# Altium PCB h743PCB.PcbDoc (part 3 of 3)
Units mil, origin at the board's own origin, x right, y up, seen from the top; angles counter-clockwise.
Board outline 2560 x 1770 mil, 4 copper layers (Top Layer, Signal, some, Bottom Layer), stack 63.712 mil thick; 101 components, 163 nets, 684 pads, 394 vias.
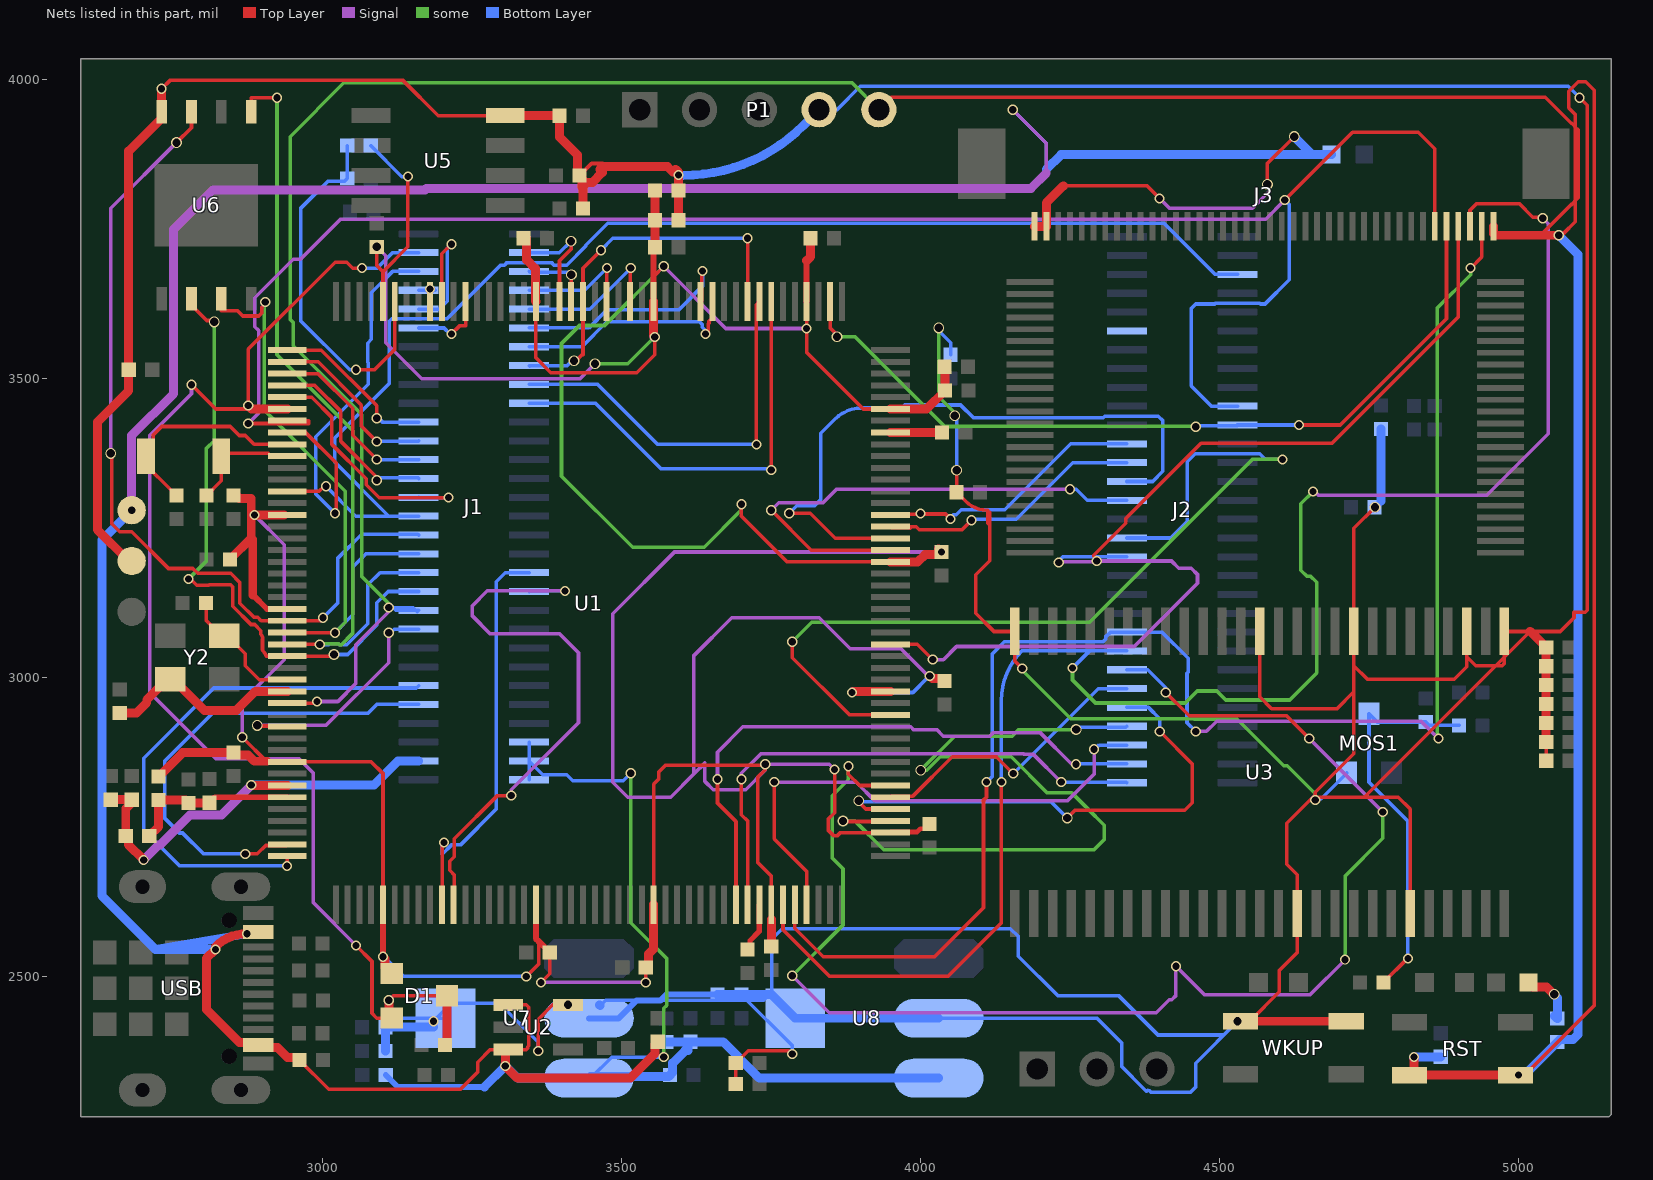
[diagram p5: the nets of this part, all layers, seen from the top]

## Via types
v1: diameter 17, hole 12, Top Layer to Bottom Layer, 305 vias
v2: diameter 18, hole 14, Top Layer to Bottom Layer, 72 vias
v3: diameter 17/16/16/16 (per signal layer), hole 12, Top Layer to Bottom Layer, 17 vias

## Nets (pads, with @x,y where several pads share a name; then routed paths per layer and width w, separated by ;. In a path a pad name is that pad's centre, name@x,y a point inside that pad or via, vN(x,y) a via of type N, cw(c..) or ccw(c..) an arc to the next point about the centre after c; other vN are vias at no path point) (continued)
PB7: J1.25 U1.165 | length 129.9
  Top Layer w6: v3(3215,3575) 3228.3,3588.3 3239.08,3588.3 3239.08,3628.17 U1.165@3238.15,3629.09
  Bottom Layer w6: J1.25@3160,3584.92 3160.09,3584.83 3202.46,3584.83 3212.29,3575 v3(3215,3575)
PB8: J1.26 U1.167 | length 255.4
  Top Layer w6: U1.167@3198.78,3629.09 3199.88,3630.19 3199.88,3657.25 3198.78,3658.35 3198.78,3708.78 v1(3215,3725)
  Bottom Layer w6: J1.26@3160,3616.42 3195,3616.42 3208.03,3629.45 3208.03,3718.03 v1(3215,3725)
PB9: J1.27 U1.168 | length 57.8
  Top Layer w6: U1.168@3179.1,3629.09 3179.1,3650 v1(3179.28,3650)
  Bottom Layer w6: J1.27@3160,3647.91 3180,3647.91 3187.56,3647.91 3185.47,3650 v1(3179.28,3650)
PB10: J2.2 U1.79 | length 1011
  Top Layer w6: v1(3660,2830) 3660,2790 3690.91,2759.09 U1.79@3690.91,2620
  Signal w6: v1(3660,2830) 3660,2875 3702.5,2917.5 3983.1,2917.5 3987.6,2913 4026.75,2913 4037.75,2902 4115.69,2902 4121.69,2908 4199.63,2908 4252.63,2855 v1(4260,2855)
  Bottom Layer w6: v1(4260,2855) 4260,2851.75 4258.25,2850 4263.8,2855.55 J2.2@4345,2855.55
PB11: J2.1 U1.80 | length 902.8
  Top Layer w6: v1(3700,2830) 3700,2770.59 3710.59,2760 U1.80@3710.59,2620
  Signal w6: v1(3700,2830) 3700,2839.75 3732.75,2872.5 4172.04,2872.5 4172.54,2872 4188,2872 v1(4235,2825)
  Bottom Layer w6: v1(4235,2825) 4344.06,2825 J2.1@4345,2824.06
PB12: J2.4 U1.92 | length 1306.3
  Top Layer w6: v2(3870,2760) 3870.81,2759.19 3948.2,2759.19 U1.92@3949.39,2760.37
  some w6: v2(3870,2760) 3890,2760 3938,2712 4290,2712 4307,2729 4307,2753 4279,2781 4253,2807 4211.75,2807 4151.25,2867.5 4032.5,2867.5 4010,2845 v2@4005,2845 ; v2(4000,2845) v2@4005,2845 ; v2(4260,2913) 4164,2913 4153,2902 4057,2902 4003.92,2848.92 4003.92,2846.08 v2@4005,2845
  Bottom Layer w6: v2(4260,2913) 4260,2913.26 4263.51,2916.77 4343.23,2916.77 J2.4@4345,2918.54
PB13: J2.5 U1.93 | length 866.8
  Top Layer w6: v2(3896.31,2794) 3896.31,2791.66 3907.91,2780.06 U1.93@3949.39,2780.06 ; v2(4245,2765) 4258,2778 4441.75,2778 4454.5,2790.75 4454.5,2855.5 v1(4400,2910)
  Bottom Layer w6: v2(3896.31,2794) 3898.31,2792 4218,2792 v2(4245,2765) ; J2.5@4345,2950.04 4380.96,2950.04 4400,2931 v1(4400,2910)
PB14: J2.6 U1.94 | length 494.3
  Top Layer w6: U1.94@3949.39,2799.74 3951.39,2801.74 3987,2801.74 4052.75,2867.5 4126.5,2867.5 v1(4154.73,2839.27)
  Bottom Layer w6: v1(4154.73,2839.27) 4297,2981.54 J2.6@4345,2981.54
PB15: J2.7 U1.95 | length 2356.2
  Top Layer w6: v1(3879,2851.53) 3879,2838.25 3897.82,2819.43 U1.95@3949.39,2819.43 ; v1(4410,2975) 4449,2936 4612,2936 v1(4650,2898)
  Signal w6: v1(3785,2501) 3847,2439 4394,2439 4416,2461 4420,2461 4427,2468 v1(4427,2517) 4475,2469 4650.97,2469 v1(4710,2528.03) ; v1(4650,2898) v1(4773,2775)
  some w6: v1(3785,2501) 3870,2586 3870,2680 3852,2698 3852,2802 3879,2829 v1(3879,2851.53) ; v1(4710,2528.03) 4710,2668 4773,2731 v1(4773,2775)
  Bottom Layer w6: J2.7@4345,3013.03 4380,3013.03 4410,2983.03 v1(4410,2975)
PC1: J1.9 U1.33 | length 417.2
  Top Layer w6: v2(2890,2920) 2891.07,2918.93 2939.22,2918.93 U1.33@2940.3,2917.85
  Signal w6: v2(2890,2920) 3005,2920 3110,3025 v1(3110,3075)
  Bottom Layer w6: v1(3110,3075) 3113.07,3075 3119.06,3080.98 J1.9@3160,3080.98
PC4: J1.49 U1.54 | length 689.9
  Top Layer w6: U1.54@3198.78,2620 3199.39,2620.61 3199.39,2704.39 3199.39,2721.17 v1(3202.22,2724)
  Bottom Layer w6: v1(3202.22,2724) 3199.39,2721.17 3199.39,2704.39 3215,2720 3230,2720 3290,2780 3290,3160.47 3305,3175.47 J1.49@3345.04,3175.47
PC5: J1.50 U1.55 | length 973.7
  Top Layer w6: U1.55@3218.47,2620 3219.72,2621.25 3219.72,2669.82 3212,2677.54 3212,2692.46 3219.72,2700.18 3219.72,2730.35 3291.92,2802.54 v1(3315,2802.54)
  Signal w6: v1(3315,2802.54) 3315,2812.09 3427.5,2924.59 3427.5,3041.54 3396.04,3073 3280,3073 3250,3103 3250,3120 3275,3145 v1(3405,3145)
  Bottom Layer w6: J1.50@3345.04,3143.98 3346.06,3145 v1(3405,3145)
PC6: J2.16 U1.115 | length 844.3
  Top Layer w6: v1(3750,3280) 3750.25,3280 3817.12,3213.13 U1.115@3949.39,3213.13
  Signal w6: v1(3750,3280) 3762.5,3292.5 3836.5,3292.5 3859,3315 v1(4250,3315)
  Bottom Layer w6: v1(4250,3315) 4260,3315 4278.5,3296.5 J2.16@4345,3296.5
PC7: J2.17 U1.116 | length 1113.7
  Top Layer w6: v1(3780,3275) 3815.03,3275 3857.21,3232.82 U1.116@3949.39,3232.82
  Bottom Layer w6: v1(3780,3275) 3792.5,3287.5 3822.25,3287.5 3832.5,3297.75 3832.5,3408.5 3856.19,3432.19 cw(c3901.56,3386.89) 3901.56,3451 3968.31,3451 3973.31,3456 4066.63,3456 4087.63,3435 4305.42,3435 4307.81,3437.39 4382.19,3437.39 4397.61,3437.39 4405,3430 4405,3345 4387.99,3327.99 J2.17@4345,3327.99
PC8: J2.18 U1.117 | length 461.7
  Top Layer w6: U1.117@3949.39,3252.5 3951.39,3250.5 3981.89,3250.5 3982.39,3250 ; U1.117@3966.64,3250.5 3968.64,3252.5 3992.5,3252.5 3997.5,3247.5 4069.06,3247.5 v1(4084.84,3263.28)
  Bottom Layer w6: v1(4084.84,3263.28) 4086.56,3265 4160,3265 4254.49,3359.49 J2.18@4345,3359.49
PC9: J2.19 U1.118 | length 497.9
  Top Layer w6: U1.118@3949.39,3272.19 3950.53,3273.33 3998.58,3273.33 v1(3999.72,3274.47) ; v1@4000.59,3273.59 4041.41,3273.59 v1(4050,3265)
  Bottom Layer w6: v1(3999.72,3274.47) 4000.59,3273.59 4041.75,3273.59 4050,3265.34 v1(4050,3265) ; 4054.9,3272.29 4059.36,3272.29 4067.84,3280.78 4140.78,3280.78 4250.98,3390.98 J2.19@4345,3390.98
PC10: J1.40 U1.139 | length 732.7
  Top Layer w6: U1.139@3749.96,3629.09 U1.139@3749.96,3629.09 v1(3750,3347.5)
  Bottom Layer w6: J1.40@3345.04,3458.94 3456.06,3458.94 3566,3349 3748.5,3349 v1(3750,3347.5)
PC11: J1.39 U1.140 | length 662.8
  Top Layer w6: v1(3725,3390) 3725,3623.82 U1.140@3730.28,3629.09
  Bottom Layer w6: J1.39@3345.04,3490.43 3459.57,3490.43 3555,3395 3560,3390 v1(3725,3390)
PC12: J1.38 U1.141 U1.155 | length 645.7
  Top Layer w6: v2(3420,3530) 3423.25,3530 3433.25,3540 3435,3540 U1.155@3435,3629.09 3435,3685 v1(3465,3715) ; v1(3710,3735) 3710.3,3734.7 3710.3,3629.39 U1.141@3710.59,3629.09
  Bottom Layer w6: J1.38@3346,3520.96 J1.38@3345.04,3521.93 3408.68,3521.93 3416.75,3530 v2(3420,3530) ; v1(3465,3715) 3485,3735 v1(3710,3735)
PC13: J1.28 U1.8 | length 703.1
  Top Layer w6: U1.8@2940.3,3409.98 2970.87,3409.99 3022.5,3358.36 3022.5,3277.5 v1(3020,3275)
  Bottom Layer w6: v1(3020,3275) 2988,3307 2988,3403 3075.5,3490.5 3075.5,3526.42 3074.69,3527.23 3074.69,3559.47 3081,3565.78 3081,3644.02 3116.39,3679.41 J1.28@3160,3679.41
PC14: C8.2 U1.9 Y1.1 | length 370.2
  Top Layer w6: C8.2@2755,3304.37 2746.19,3313.18 2746.07,3313.18 2704.02,3355.24 Y1.1@2704.02,3370 2715.78,3381.76 2715.78,3405.78 2730,3420 2845,3420 2860,3405 2870,3405 2884.7,3390.3 U1.9@2940.3,3390.3
PC15: C9.2 U1.10 Y1.2 | length 190.2
  Top Layer w6: C9.2@2805,3304.37 2830,3329.37 Y1.2@2830,3370 2835,3375 2908.43,3375 2912.82,3370.61 U1.10@2940.3,3370.61
PD2: J1.37 U1.144 | length 386.2
  Top Layer w6: v1(3639.81,3575) 3641.09,3575 3644.6,3578.51 3644.6,3591.64 3645.85,3592.89 3645.85,3595.93 3651.54,3601.61 U1.144@3651.54,3629.09
  Bottom Layer w6: J1.37@3345.04,3553.43 3433.43,3553.43 3475,3595 3630,3595 3634.24,3590.76 3634.24,3586.23 3640.16,3580.32 3640.16,3575.35 v1(3639.81,3575)
PD3: J1.36 U1.145 | length 396.2
  Top Layer w6: U1.145@3631.85,3629.09 3633.43,3630.67 3633.43,3678.43 v1(3635,3680)
  Bottom Layer w6: J1.36@3345.04,3584.92 3444.92,3584.92 3475,3615 3595,3615 3635,3655 v1(3635,3680)
PD7: J1.35 U1.151 | length 254.8
  Top Layer w6: U1.151@3513.74,3629.09 3514.37,3629.72 3514.37,3684.37 v1(3515,3685)
  Bottom Layer w6: J1.35@3345.04,3616.42 3446.42,3616.42 v1(3515,3685)
PD13: J2.14 U1.101 | length 1557.9
  Top Layer w6: v1(3785,3060) 3785,3033.28 3880.74,2937.54 U1.101@3949.39,2937.54
  some w6: v1(3785,3060) 3817.5,3092.5 4282.5,3092.5 4555,3365 v1(4605,3365)
  Bottom Layer w6: J2.14@4345,3233.5 4418.5,3233.5 4446,3261 4446,3361 4459.39,3374.39 4567.23,3374.39 4576.63,3365 v1(4605,3365)
PDR_ON: R4.1 R5.2 U1.171 | length 627.5
  Top Layer w6: v1(3055,3515) 3086.29,3515 3120.04,3548.75 U1.171@3120.04,3629.09
  Bottom Layer w6: R5.2@3040.63,3890 R4.1@3040.63,3835 3035.63,3830 3007.77,3830 2962.5,3784.73 2962.5,3597.04 3044.54,3515 v1(3055,3515)
PE2: J1.20 U1.1 | length 282
  Top Layer w6: U1.1@2940.3,3547.78 2997.22,3547.78 3090,3455 v1(3090,3433.71)
  Bottom Layer w6: v1(3090,3433.71) 3093.25,3433.71 3099.52,3427.44 J1.20@3160,3427.44
PE3: J1.19 U1.2 | length 295.7
  Top Layer w6: U1.2@2940.3,3528.09 2991.91,3528.09 3064.14,3455.86 3064.14,3420.86 v1(3090,3395)
  Bottom Layer w6: v1(3090,3395) 3129.06,3395 3159.06,3395 J1.19@3160,3395.94
PE4: J1.18 U1.3 | length 305.7
  Top Layer w6: U1.3@2940.3,3508.41 2991.59,3508.41 3049.57,3450.43 3049.57,3410.43 3049.57,3405.43 v3(3090,3365)
  Bottom Layer w6: v3(3090,3365) 3090.28,3364.72 3159.72,3364.72 J1.18@3160,3364.45
PE5: J1.17 U1.4 | length 319.7
  Top Layer w6: U1.4@2940.3,3488.72 2986.28,3488.72 3030,3445 3030,3395 3090,3335 v1(3090,3330)
  Bottom Layer w6: v1(3090,3330) 3093.98,3333.98 3158.98,3333.98 J1.17@3160,3332.95
PE6: J1.16 U1.5 | length 423.2
  Top Layer w6: U1.5@2940.3,3469.04 2980.96,3469.04 3015,3435 3015,3390 3072.5,3332.5 3072.5,3322.75 3094.25,3301 v1(3210,3301)
  Bottom Layer w6: J1.16@3160,3301.46 3159.27,3300.73 3209.73,3300.73 v1(3210,3301)
PF6: J1.14 U1.24 U6.7 | length 1451.3
  Top Layer w6: v2(2645,3375) 2646.52,3373.48 2646.52,3257.47 2660,3243.99 2680.01,3243.99 2741.5,3182.5 2782.25,3182.5 2790.25,3174.5 2845.47,3174.5 2861,3158.97 2861,3124.2 2884.5,3100.71 2890.75,3100.71 2896.43,3095.02 U1.24@2940.3,3095.02 2994.99,3095.01 v3(3000,3100) ; v2(2755,3895) 2780,3920 2780,3922.65 U6.7@2780,3946.5
  Signal w6: v2(2645,3375) 2645,3785 v2(2755,3895)
  Bottom Layer w6: v3(3000,3100) 3025,3125 3025,3200 3065,3240 3158.46,3240 J1.14@3160,3238.46
PF7: J1.13 U1.25 U6.3 | length 1056.8
  Top Layer w6: U6.3@2830,3633.5 2830,3614 2856.82,3614 2866,3604.82 2892.59,3604.82 2897.86,3610.09 2897.86,3619.63 2903.36,3625.13 v1(2903.36,3628.11) ; U1.25@2945,3075.34 U1.25@2940.63,3075.34 ; v1@3019.83,3075.17 U1.25@2940.46,3075.17 ; U1.25@2940.46,3075.17 U1.25@2940.63,3075.34 ; U1.25@2940.46,3075.17 U1.25@2940.3,3075.34 U1.25@2940.63,3075.34
  some w6: v1(2903.36,3628.11) 2902,3626.75 2902,3447.04 3037.5,3311.54 3037.5,3092.5 v1(3020,3075)
  Bottom Layer w6: v1(3020,3075) 3050,3105 3050,3185 3071.97,3206.97 J1.13@3160,3206.97
PF8: J1.12 U1.26 U6.5 | length 1403.7
  Top Layer w6: U6.5@2880,3946.5 2880,3970 v1(2923,3970) ; U1.26@2940.62,3055.33 U1.26@2940.3,3055.65 2940.46,3055.49 2994.51,3055.49 v1(2994.68,3055.33)
  some w6: v1(2923,3970) 2923,3540 3049.5,3413.5 3049.5,3073.58 3030.92,3055 3027.38,3055 3025.82,3056.56 2995.91,3056.56 v1(2994.68,3055.33)
  Bottom Layer w6: 3009.67,3055.33 v1(2994.68,3055.33) 2995,3055 2996.56,3056.56 3025.82,3056.56 3027.38,3055 3040,3055 3075,3090 3075,3155 3095.47,3175.47 J1.12@3160,3175.47
PF9: J1.11 U1.27 U6.2 | length 1052.1
  Top Layer w6: v1(2775,3165) 2777.98,3165 2788.57,3154.41 2809.09,3154.41 2809.68,3155 2845.49,3155 2849,3151.49 2849,3119.23 2879.52,3088.71 2885.78,3088.71 2896,3078.48 2896,3072.23 cw(c2886.34,3062.57) 2899.09,3067.46 2899.09,3064.66 2898.82,3064.38 2898.82,3046.92 2899.08,3046.66 2899.08,3044.96 2900.96,3043.07 cw(c2896.72,3038.83) 2902.03,3041.63 ; U6.2@2780,3633.5 2780,3622.68 2805.38,3597.3 2815.7,3597.3 v2(2818,3595) ; 2902.03,3041.62 2905,3035.97 2909.52,3035.97 U1.27@2940.3,3035.97 2940.78,3035.48 3015.29,3035.48 v2(3018.36,3038.56)
  some w6: v1(2775,3165) 2805,3195 2805,3383.38 2818,3396.38 v2(2818,3595)
  Bottom Layer w6: v2(3018.36,3038.56) 3041.18,3038.56 3090,3087.38 3090,3125 3108.98,3143.98 J1.11@3160,3143.98
PG3: J2.13 J3.37 U1.107 | length 1903.7
  Top Layer w6: U1.107@3949.39,3055.65 3994.35,3055.65 v1(4020,3030) ; v1(4294.5,3195) 4294.5,3197.98 4289.74,3202.74 4289.74,3204.74 4343,3258 4343,3266 4469,3392 4688.17,3392 4899.33,3603.16 J3.37@4899.33,3755
  Signal w6: v1(4020,3030) 4038,3030 4060,3052 4357.46,3052 4463,3157.54 4463,3172.46 4452.46,3183 4431.69,3183 4419.69,3195 v1(4294.5,3195) 4293.25,3193.75 4232.23,3193.75 v1(4230.98,3192.5)
  Bottom Layer w6: v1(4230.98,3192.5) 4230.98,3194.98 4238.01,3202.01 4287.01,3202.01 v1@4294.5,3202.01 ; v1(4294.5,3195) v1@4294.5,3202.01 ; J2.13@4345,3202.01 v1@4294.5,3202.01
PG10: J1.34 U1.153 | length 201.5
  Top Layer w6: U1.153@3474.37,3629.09 3474.69,3629.41 3474.69,3684.69 v1(3475,3685)
  Bottom Layer w6: J1.34@3345.04,3647.91 3437.91,3647.91 v1(3475,3685)
PG12: J2.25
PG13: J1.33 U1.156 | length 117.7
  Top Layer w6: U1.156@3415.32,3629.09 3415.44,3629.22 3415.44,3673.72 v2(3415.57,3673.85)
  Bottom Layer w6: J1.33@3345.04,3679.41 3346.45,3678 3408.17,3678 3412.32,3673.85 v2(3415.57,3673.85)
PG14: J1.32 U1.157 | length 187.2
  Top Layer w6: U1.157@3395.63,3629.09 3395.63,3692.38 3395.63,3697.38 3415,3716.75 v2(3415,3730)
  Bottom Layer w6: J1.32@3345.04,3710.91 3345.49,3710.45 3395.45,3710.45 v2(3415,3730)
PH0: C11.2 U1.29 Y2.3 | length 217.9
  Top Layer w6: C11.2@2804.37,3125 2804.37,3095.71 2830.08,3070 Y2.3@2835,3070 2839.92,3070 2865.68,3044.24 2870,3039.92 2870,3020 2893.41,2996.59 U1.29@2940.3,2996.59
PH1: C10.2 U1.30 Y2.1 | length 341.4
  Top Layer w15: C10.2@2660,2940.63 2687.91,2940.63 2705.14,2957.86 2705.14,2962.78 2739.53,2997.17 Y2.1@2744.45,2997.17 2749.37,2997.17 2801.54,2945 2855,2945 2886.91,2976.91 U1.30@2940.3,2976.91
PH2: J1.5 U1.43 | length 796.1
  Top Layer w6: v1(2870,2705) 2890,2705 2904,2719 2938.3,2719 U1.43@2940.3,2721
  Bottom Layer w6: v1(2870,2705) 2800,2705 2765,2740 2760,2740 2735,2765 2735,2860 2765,2890 2815,2940 3075,2940 3090,2955 J1.5@3160,2955
PH3: J1.6 U1.44 | length 911.6
  Top Layer w6: v1(2940,2685) 2940,2701.02 U1.44@2940.3,2701.32
  Bottom Layer w6: v1(2940,2685) 2760,2685 2740,2705 2700,2745 2700,2865 2817.5,2982.5 3156,2982.5 J1.6@3160,2986.5
PH6: J2.8 J3.38 U1.83 | length 2927.2
  Top Layer w6: U1.83@3769.65,2620 3769.65,2578.28 3847.92,2500 4045,2500 4135,2590 v1(4135,2825) ; J3.38@4919.02,3755 4919.02,3782.02 4930,3793 5001.24,3793 5023.99,3770.25 5038.75,3770.25 v1(5040.63,3768.37)
  Signal w6: v1(4656.5,3311.25) 4659.27,3311.25 4665.51,3305 4947,3305 5050,3408 5050,3759 v1(5040.63,3768.37)
  some w6: v1(4254,3016) 4254,2995.81 4292.31,2957.5 4442.75,2957.5 4462.75,2977.5 4495.5,2977.5 4510.5,2962.5 4617.25,2962.5 4662.5,3007.75 4662.5,3159.25 4652.25,3169.5 4646.21,3169.5 4636,3179.71 4636,3290.75 v1(4656.5,3311.25)
  Bottom Layer w6: v1(4135,2825) 4135,2961.67 ; 4135,2961.72 cw(c4252.11,2961.72) 4169.3,3044.53 4282.53,3044.53 ; v1(4254,3016) 4282.53,3044.53 ; J2.8@4345,3044.53 4282.53,3044.53
PH7: J2.9 J3.39 U1.84 | length 2645.1
  Top Layer w6: U1.84@3789.33,2620 3789.33,2580.67 3837,2533 4023,2533 4105,2615 4105,2795 4110,2800 v1(4110,2825) ; v1(4920,3685) 4938.7,3703.7 J3.39@4938.7,3755
  Signal w6: v1(4460,2910) 4478,2910 4495,2927 4837,2927 v1(4866,2898)
  some w6: v1(4866,2898) 4864.5,2899.5 4864.5,3618.5 4920,3674 v1(4920,3685)
  Bottom Layer w6: v1(4110,2825) 4120,2835 4120,3040 4140,3060 4305,3060 4309.24,3064.24 4309.24,3067.83 4317.44,3076.02 J2.9@4345,3076.02 4403.72,3076.02 4447.5,3032.25 4447.5,3009.22 4445.5,3007.22 4445.5,2924.5 v1(4460,2910)
PH8: J2.3 U1.85 | length 905.8
  Top Layer w6: v1(3755,2825) 3755,2730 3809.02,2675.98 U1.85@3809.02,2620
  Signal w6: v1(3755,2825) 3892.25,2825 3923.67,2793.58 4245.3,2793.58 4290,2838.28 v1(4290,2880)
  Bottom Layer w6: v1(4290,2880) 4290,2878.64 4286.36,2875 4298.41,2887.05 J2.3@4345,2887.05
PI3: J2.41 J3.36 U1.134 | length 1375.8
  Top Layer w6: U1.134@3848.39,3629.09 3848.39,3584.86 3860,3573.25 v2(3860,3570) ; v1(4633,3422.48) 4701.68,3422.48 4879.65,3600.44 J3.36@4879.65,3755
  some w6: v2(3860,3570) 3890,3570 4040,3420 4064.46,3420 4064.96,3420.5 4459,3420.5 v1(4460,3419.5)
  Bottom Layer w6: v1(4460,3419.5) 4461.49,3420.99 4528.55,3420.99 J2.41@4530.04,3422.48 v1(4633,3422.48)
PI8: J2.40 J3.35 U1.7 | length 3134.5
  Top Layer w6: v1(2875,3425) 2975.78,3425 2975.78,3429.83 2940.46,3429.83 U1.7@2940.3,3429.67 ; v1(4609,3799) 4722.5,3912.5 4832.25,3912.5 4859.96,3884.79 J3.35@4859.96,3755
  Signal w6: v1(2875,3425) 2892.5,3442.5 2892.5,3580.49 2885.86,3587.13 2885.86,3635.36 2950.43,3699.93 2962.27,3699.93 3029.35,3767 4577,3767 v1(4609,3799)
  Bottom Layer w6: J2.40@4530.04,3453.98 4486.43,3453.98 4452.5,3487.9 4452.5,3617.51 4459.99,3625 4491.49,3625 4492.85,3626.36 4567.23,3626.36 4568.59,3625 4576,3625 4616.5,3665.5 4616.5,3791.5 v1(4609,3799)
PI11: J1.15 J2.33 U1.13 | length 2171.7
  Top Layer w6: U1.13@2940.3,3311.56 2993.44,3311.56 3001.89,3320 v3(3005,3320)
  Bottom Layer w6: v3(3005,3320) 3055.02,3269.98 3110.02,3269.98 ; J1.15@3160,3269.96 3110.02,3269.98 ; J2.33@4530.04,3674.45 4492.55,3674.45 4407,3760 3476.33,3760 3439.48,3723.15 3439.48,3721.85 3407.63,3690 3386.55,3690 3382.23,3694.32 3307.85,3694.32 3303.53,3690 3297,3690 3207,3600 3125,3600 3115,3600 3111,3596 3111,3586 3111,3492 3020,3401 3020,3360 3110.02,3269.98
RESET: C12.1 J1.10 J3.40 P1.5 R6.1 RST.1 U1.31 | length 7584.5
  Top Layer w6: U1.31@2940.3,2957.22 2990,2957.22 v1(2990,2960) ; P1.5@3930,3950 3951,3971 5045,3971 5088.52,3927.48 5089.07,3927.48 5094.34,3922.21 5094.34,3921.66 5100,3916 5100,3803 5094.34,3797.34 5094.34,3796.64 5089.07,3791.37 5088.37,3791.37 5040,3743 5075.5,3743 5095,3762.5 5095,3942 5084,3953 5084,3981 5100,3997 5112.5,3997 5127,3982.5 5127,2451.25 RST.1@5010.75,2335
  Top Layer w15: RST.1@4817.83,2335 RST.1@4818.72,2335 ; v1(4825,2365) 4825,2341.28 RST.1@4818.72,2335 ; J3.40@4958.39,3755 4958.39,3742.58 4960.96,3740 5040,3740 v1(5067.5,3740) ; RST.1@5010.75,2335 RST.1@4995,2335 RST.1@4818.72,2335
  Signal w6: v1(2990,2960) 3025,2960 3055,2990 3055,3055 3110,3110 v1(3110,3117)
  some w6: v1(3110,3117) 3110,3124 3069,3165 3065,3169 3065,3440 2950,3555 2950,3594 2945,3599 2945,3905 3035,3995 3885,3995 P1.5@3930,3950
  Bottom Layer w6: v1(3110,3117) 3150.52,3117 J1.10@3157.52,3110 ; v1@3115,3119 3121.52,3112.48 J1.10@3160,3112.48
  Bottom Layer w15: v1(4825,2365) 4825.32,2365.32 4869.69,2365.32 C12.1@4870,2365.63 ; v3(5000,2335) 5000.19,2335.19 5010.19,2335.19 R6.1@5065,2390 5069.31,2394.31 5091.21,2394.31 5100,2403.1 5100,3707.5 v1(5067.5,3740)
VBAT: C1.2 D1.2 D1.3 J1.29 U1.6 | length 2268.5
  Top Layer w6: v1(2780,3490) 2820.65,3449.35 2875,3449.35 U1.6@2940.3,3449.35 ; v1(2875,3455) 2875,3549.54 3020.46,3695 3039.67,3695 3049.67,3685 v1(3065,3685) ; v1(3055,2552) 3082,2525 3082,2438.2 3090,2430.2 D1.2@3115,2430.2 ; v1(3110,2460) 3117.6,2467.6 D1.3@3207.52,2467.6
  Top Layer w15: v1(2875,3455) 2880.33,3449.68 2939.97,3449.68 U1.6@2940.3,3449.35 ; v1(3110,2460) 3110.57,2459.43 3110.57,2434.62 D1.2@3115,2430.2 ; C1.2@3204.37,2385 3207.52,2388.15 D1.3@3207.52,2467.6
  Signal w6: v1(2780,3490) 2780,3475 2710,3405 2710,2975 2821,2864 2960,2864 2984,2840 2984,2623 v1(3055,2552)
  Bottom Layer w6: v1(3065,3685) 3090.35,3685 3116.26,3710.91 J1.29@3160,3710.91
VCAP1: C3.2 U1.81 | length 83.4
  Top Layer w9: C3.2@3710,2545 3714.31,2549.31 3714.31,2559.64 3729.78,2575.11 3729.78,2619.5 U1.81@3730.28,2620
VCAP2: C5.1 U1.125 | length 86.2
  Top Layer w15: U1.125@3949.39,3409.98 C5.1@4035.63,3410
VCC: R6.2 R10.1 | length 100.1
  Top Layer w15: R10.1@5017,2490 5024.5,2482.5 5046.69,2482.5 5059.19,2470 v2(5060,2470)
  Bottom Layer w15: v2(5060,2470) 5060,2469.19 5065,2464.19 R6.2@5065,2429.37 R6.2@5060.69,2433.68
VCC3.3: C31.2 C32.2 C37.2 C38.2 C39.2 C40.2 C41.2 C42.2 C43.2 C44.1 C45.1 C64.1 C65.1 C66.1 C68.1 G3.3V.1 MOS1.2 P1.4 R8.1 R9.1 R16.2 R17.1 R18.2 R19.1 R20.2 R21.2 U2.5 U3.1 U3.3 U3.9 U3.14 U3.27 U3.43 U3.49 U5.8 U6.8 U7.2 U7.4 U8.2 U8.4 WKUP.2 | length 12449.4
  Top Layer w6: v1(2730,3985) 2744,3999 3134,3999 3193,3940 U5.8@3305,3940 ; v1(3360,2375) 3360,2428 3384.4,2452.4 v2(3410,2452.4) ; R20.2@3429.37,3840 3449.37,3860 3468.05,3860 ; 3585.6,3845.61 3589.99,3845.61 3589.99,3850.01 ; C31.2@3690.63,2320 C32.2@3690.63,2355 3711.44,2375.81 3779.19,2375.81 v1(3785,2370) ; v2(4060,3347) R18.2@4060,3310 4075.18,3294.82 ccw(c4110.72,3330.36) 4110.72,3280.1 4111.88,3280.1 4111.88,3258.62 4115.5,3255 ; 4115.5,3276.49 4115.5,3255 ; U3.27@4157.6,3077.44 U3.27@4157.6,3077 ; v1(4170,3015) 4157.6,3027.4 U3.27@4157.6,3077 ; WKUP.2@4535,2425 4550.75,2425 4600,2474.25 4600,2510 4630.04,2540.04 U3.43@4630.04,2605 4630.04,2670.21 4612.5,2687.75 4612.5,2756.5 4656,2800 v1@4660,2800 ; U3.14@4567.05,3077.44 4567.05,2967.95 4587,2948 4696.5,2948 4724.53,2976.03 ; v2(4760,3285) 4724.53,3249.53 U3.9@4724.53,3077.44 4724.53,3020 ; U3.49@4819.02,2605 4819.02,2780 4799.02,2800 v1@4660,2800 ; U3.3@4913.5,3077.44 4913.5,3035 ; 5019.57,3077.44 4742.13,2800 v1@4660,2800 ; C39.2@5046.46,2860.81 C38.2@5046.46,2892.43 ; v1(5102.34,3970) 5115,3957.34 5115,3112.85 5111.49,3109.34 5093,3109.34 5093,3100 5070,3077 5019.57,3077 4976.5,3077 4976.5,3023.51 4972.98,3020 4928.5,3020 4913.5,3035 ; 4115.5,3255 4115.5,3195.25 4092,3171.75 4092,3107.54 4122.54,3077 U3.27@4157.6,3077 ; v1@4660,2800 4660,2808 4724.53,2872.53 4724.53,2976.03 ; 4724.53,2976.03 4724.53,3020 ; 4724.53,3020 4747.53,2997 4892.46,2997 4913.5,3018.05 4913.5,3035
  Top Layer w15: G3.3V.1@2680,3195 2675,3195 2622.5,3247.5 2622.5,3427.5 2675,3480 C44.1@2675,3515 2675,3880.67 2730,3935.67 U6.8@2730,3946.5 v1(2730,3985) ; U5.8@3305,3940 C45.1@3395.63,3940 3395.63,3904.37 3425.69,3874.31 3425.69,3843.68 R20.2@3429.37,3840 3433.68,3835.69 3433.68,3828.1 3433.68,3820.63 ; R21.2@3435,3785 3435,3819.31 3433.68,3820.63 ; 3585.6,3845.61 3576.21,3855 3468.05,3855 3463.05,3850 3468.05,3845 3467.51,3845 3450.61,3828.1 3441.15,3828.1 3433.68,3820.63 ; 3589.99,3850.01 3595,3845 3595,3840 R9.1@3595,3815 R8.1@3595,3765 ; WKUP.2@4535,2425 4580,2425 4640,2425 WKUP.2@4712.17,2425 ; 5019.57,3077.44 C41.2@5046.46,3050.54 C42.2@5046.46,3018.92 C43.2@5046.46,2987.3 C40.2@5046.46,2955.68 C37.2@5046.46,2924.06 C38.2@5046.46,2892.43
  some w6: v2(4030,3585) 4030,3470 4057,3443 v2(4057,3438) ; v1(4170,3015) 4170,3012.03 4251.03,2931 4457.28,2931 4457.78,2930.5 4529.5,2930.5 4607.5,2852.5 4613.25,2852.5 4660,2805.75 v1(4660,2795)
  Bottom Layer w6: C64.1@3104.37,2415 3119.37,2430 U7.4@3205,2430 ; U7.4@3185,2415 v1(3185,2425) 3215,2455 3245,2455 3295,2455 3320,2430 3360,2390 v1(3360,2375) ; U7.2@3463.88,2451 3472.88,2460 3524.68,2460 3565,2460 3709.37,2460 3737.5,2460 3751,2473.5 3751,2562.5 3768.5,2580 4150,2580 4163,2567 4163,2534 4229,2468 4331,2468 4397,2402 4507,2402 v2(4530,2425) 4460,2355 4460,2315 4451.47,2306.47 4384.87,2306.47 4382.93,2308.41 4379.53,2309.53 4377.76,2307.76 4374.22,2311.3 4336,2349.51 4336,2389 4295,2430 U8.2@4030,2430 ; C66.1@3700,2469.37 3785,2384.37 v1(3785,2370) ; P1.4@3830,3950 3860,3950 3899,3989 5083.34,3989 v1(5102.34,3970) ; v2(4030,3585) 4030,3580 4050,3560 4050,3559 R17.1@4050,3540 ; v2(4057,3438) 4060,3435 v2(4060,3347) ; v1(4660,2795) 4662.1,2797.1 4669.9,2797.1 4712.6,2839.8 MOS1.2@4712.6,2840.79
  Bottom Layer w10: U7.2@3445,2430 3494.68,2430 3524.68,2460 3565,2460 3575,2470 C68.1@3660,2470
  Bottom Layer w15: C65.1@3104.37,2375 C64.1@3104.37,2415 3165,2415 U7.4@3185,2415 ; U7.2@3462.33,2452.4 U7.2@3463.88,2451 ; v1(3595,3841) 3595,3840 3601.28,3840 3601.36,3840 ccw(c3601.36,4126.42) 3803.93,3923.93 P1.4@3830,3950 ; C68.1@3660,2470 3660.32,2469.69 3699.69,2469.69 C66.1@3700,2469.37 3750.63,2469.37 U8.4@3790,2430 U8.2@4030,2430 ; R19.1@4770,3295.63 R16.2@4770,3415.63
VCC3.3M: C13.1 C14.1 C15.1 C16.1 C17.1 C18.1 C19.1 C20.1 C21.1 C22.1 C23.1 C24.1 C25.1 C26.1 C27.1 D1.1 R3.1 R5.1 R8.2 R9.2 U1.15 U1.23 U1.36 U1.49 U1.62 U1.72 U1.82 U1.91 U1.103 U1.114 U1.127 U1.136 U1.149 U1.159 U1.172 | length 9474.8
  Top Layer w6: C18.1@2850,3304.37 2855,3304.37 2858,3304.37 2858,3305 C18.1@2855,3305 ; v1(2865,2900) 2906.2,2858.8 U1.36@2940.3,2858.8 3081,2858.8 3100.36,2839.44 U1.49@3100.36,2620 ; v2(3090,3720.63) 3090,3689.36 3100.36,3679 ; U1.172@3100.36,3629.09 3100.36,3679 ; v1(3142,3838) 3142,3740.43 3142,3720.64 3100.36,3679 ; C22.1@3335.63,3735 C22.1@3340.63,3735 ; v1(3340,2500) 3360.81,2520.81 3360.81,2558.56 ; U1.159@3356.26,3629.09 3356.26,3535 3381.26,3510 3525,3510 3555,3540 v1(3555,3570) ; v1(3365,2490) 3379.37,2504.37 C19.1@3379.37,2540 ; v1(3540,2490) C15.1@3540,2515 ; U1.72@3553.11,2620 3553.11,2821.83 3562,2830.72 3562,2842.46 3572.54,2853 3738,2853 v1(3740,2855) 3740,2846 3727.5,2833.5 3727.5,2690.46 3749.98,2667.98 U1.82@3749.98,2595.02 ; 3553.11,3671.11 v1(3570,3688) ; v1(3700,3290) 3700,3270.25 3776.81,3193.45 U1.114@3949.39,3193.45 ; U1.136@3809.02,3629.09 v1(3809.02,3584) 3809,3544.35 3904,3449.35 U1.127@3949.39,3449.35 ; v1(3856,2846) 3856,2773.99 3845,2762.99 3845,2745 3855,2735 3860,2735 3865.69,2740.69 U1.91@3949.39,2740.69 U1.91@3950.39,2741.69
  Top Layer w8: U1.91@3950.39,2741.69 3993.87,2741.69 3999.37,2747.19 4007.19,2747.19 C20.1@4015,2755
  Top Layer w10: 2882.5,3138.44 2906.24,3114.71 U1.23@2940.3,3114.71 ; v1@2892,3271.91 2892.27,3272.19 U1.15@2940.3,3272.19 ; v1(3100.3,2533) 3100.3,2534.95 3100.36,2535 U1.49@3100.36,2620 ; U1.62@3356.26,2620 3356.26,2563.11 3360.81,2558.56 C19.1@3379.37,2540 ; U1.149@3553.11,3629.09 3553.11,3671.11 3553.11,3717.48 C21.1@3555.63,3720 ; U1.136@3809.02,3629.09 3809.02,3697.46
  Top Layer w15: R3.1@2725,2834.37 2765,2874.37 C13.1@2850,2874.37 2854.31,2870.06 2874.94,2870.06 2885,2860 2906.2,2860 ; C26.1@2844.32,3197.52 2880,3233.2 ; C18.1@2855,3305 2860.5,3299.5 2880,3299.5 2880,3271.91 v1@2880,3266.6 ; 2882.5,3138.44 2882.5,3230.7 2880,3233.2 ; U1.15@2935.02,3271.91 2892,3271.91 v1(2885.32,3271.91) v1@2880,3266.6 ; v1(3100.3,2533) 3100.3,2532.46 3103.8,2528.96 3103.8,2515.22 3114.02,2505 D1.1@3115,2505 ; C22.1@3340.63,3735 3340.63,3698.95 3355.5,3684.07 3355.5,3629.85 U1.159@3356.26,3629.09 ; C15.1@3540,2515 3544.31,2519.31 3544.31,2537.44 3553.11,2546.24 U1.72@3553.11,2620 ; U1.149@3553.11,3629.09 3553.11,3572.7 v1(3555,3570) ; C21.1@3555.63,3720 R8.2@3555.63,3765 R9.2@3555.63,3815 ; C14.1@3750,2550 U1.82@3749.98,2595.02 ; 3809.02,3697.46 3815.63,3704.07 C23.1@3815.63,3735 ; v1(3885,2975) 3886.91,2976.91 U1.103@3949.39,2976.91 ; U1.114@3949.39,3193.45 3995,3193.45 4007.24,3205.69 4030.69,3205.69 v1(4035,3210) C24.1@4030,3215 ; U1.127@3949.39,3449.35 4009.98,3449.35 C16.1@4040.63,3480 4040.32,3480.32 4040.32,3519.69 C17.1@4040,3520 ; v1(4015,3002.5) 4015.54,3002.5 4019.36,2998.68 4035.69,2998.68 C25.1@4040,2994.37 ; 2880,3233.2 v1@2880,3266.6
  Signal w6: v1(2865,2900) 2865,2960 2935,3030 2935,3222.23 v1(2885.32,3271.91) ; v2(3090,3720.63) 3105,3705.63 3105,3560 3165,3500 3430,3500 v2(3455,3525) ; v1(3365,2490) v1(3540,2490) ; v1(3570,3688) 3674,3584 v1(3809.02,3584) ; v1(3856,2846) 3847,2855 v1(3740,2855) 3740,2845.25 3707.25,2812.5 3652.75,2812.5 3639,2826.25 3639,2857 3620,2838 ; v1(4015,3002.5) 4012.5,3002.5 3967,3048 3882,3048 3830,3100 3684,3100 3620,3036 3620,2838 ; v1(4035,3210) 3588,3210 3485,3107 3485,2825 3510,2800 3582,2800 3620,2838
  some w6: v2(3455,3525) 3510,3525 v1(3555,3570) ; v1(3570,3688) 3471,3589 3429,3589 3399,3559 3399,3517 3399,3495 3399,3337 3518,3218 3637.75,3218 3700,3280.25 v1(3700,3290)
  Bottom Layer w6: R5.1@3080,3890 3132,3838 v1(3142,3838) ; v1(3100.3,2533) 3102.36,2533 3135.36,2500 v1(3340,2500) ; v1(3885,2975) 3987,2975 4012,3000 4012.5,3000 v1(4015,3002.5)
VCC5: 5V.1 C28.2 C29.2 C33.2 C60.1 C61.1 C62.1 C63.1 J1.58 J1.59 J1.60 J3.1 J3.2 U2.1 U2.3 U7.3 U8.3 USB.2 USB.11 | length 7650.6
  Top Layer w6: C33.2@2960.63,2360 3009.63,2311 3230,2311 3259,2340 3259,2356.6 3280,2377.6 U2.3@3307.5,2377.6 ; U2.3@3310,2377.6 3340,2377.6 3342.5,2380.1 3342.5,2382.25 3344,2383.75 3344,2448.4 3340,2452.4 U2.1@3310,2452.4 ; C29.2@3555.69,2386.32 C29.2@3560,2390.63 ; 4238.71,3822.5 4378.75,3822.5 v1(4399.75,3801.5) ; v2(4580,3825) 4580,3860 v2(4625,3905)
  Top Layer w15: v1(2820,2545) 2805,2530 2805,2445 2860.18,2389.82 2887.64,2389.82 USB.11@2891.95,2385.51 2896.26,2381.2 2923.8,2381.2 2940.69,2364.31 2956.32,2364.31 C33.2@2960.63,2360 ; v1@2820,2549.64 cw(c2872.73,2496.92) v1(2872.73,2571.48) 2888.94,2571.48 USB.2@2891.95,2574.49 ; U2.3@3310,2377.6 3307.5,2377.6 3305,2375.1 v1(3305,2350) 3325,2330 3514.37,2330 3555.69,2371.32 C29.2@3555.69,2386.32 ; J3.1@4190.67,3755 J3.2@4210.36,3755 4210.18,3755.18 4210.18,3793.97 4238.71,3822.5
  Signal w6: v1(4154,3950) 4210,3894 4210,3850 4210,3844 ; v1(4399.75,3801.5) 4416.25,3785 4555,3785 4582.51,3812.51 4582.51,3817.49 4582.51,3822.49 v2(4580,3825)
  Signal w15: v1(2680,3280) 2680,3405 2750,3475 2750,3750 2816,3816 3170.39,3816 3172.89,3818.5 4184.5,3818.5 4210,3844
  some w6: v1(3515,2840) 3515,2590 3575,2530 3575,2451.49 3570,2446.49 v1(3570,2365)
  Bottom Layer w6: J1.60@3345.04,2829.02 J1.59@3345.04,2860 ; J1.58@3345.04,2892.01 J1.59@3345.04,2860.51 J1.59@3345.04,2860 ; U7.3@3445,2330 3448,2330 3483,2365 v1(3570,2365) ; v1(3515,2840) 3502.5,2827.5 3417.75,2827.5 3407.75,2837.5 3367.54,2837.5 J1.59@3345.04,2860 ; v1(4154,3950) 4210,3894 4210,3850 4210,3844
  Bottom Layer w10: C61.1@3105,2335 3125,2315 3270,2315
  Bottom Layer w15: v1(2680,3280) 2630,3230 2630,2635 2720,2545 ; v1(2820,2545) 2720,2545 ; v1(2872.73,2571.48) 2720,2545 ; 3270,2315 v1(3305,2350) 3305.81,2350 3325.81,2330 U7.3@3445,2330 3447.5,2332.5 3578.13,2332.5 C60.1@3580.63,2335 3584.94,2339.31 3584.94,2354.94 3605.69,2375.69 3610.69,2375.69 3610.69,2386.32 C62.1@3614.69,2390.32 ; C63.1@3575,2390 3575.32,2390.32 C62.1@3614.69,2390.32 ; U8.3@4030,2330 3730,2330 3669.37,2390.63 C62.1@3615,2390.63 C62.1@3614.69,2390.32 ; 4210,3850 4234.94,3874.94 C28.2@4687.5,3874.94 4655.06,3874.94 v2(4625,3905)
VCC_LED: C?34.1 MOS1.3 R13.1 R15.2 | length 651.9
  Top Layer w6: R15.2@4774.37,2490 4814.37,2530 v1(4815,2530)
  Bottom Layer w6: v1(4815,2530) 4815,2760 4750,2825 MOS1.3@4750,2939.21 4763.58,2925.63 C?34.1@4845,2925.63 4850.63,2920 R13.1@4900.63,2920
VDDA: C6.1 C7.1 R2.1 R3.2 U1.39 | length 287.9
  Top Layer w10: C6.1@2809.69,2790.32 C6.1@2810,2790.63 2819.11,2799.74 U1.39@2940.3,2799.74
  Top Layer w15: R2.1@2709.37,2735 2725,2750.63 R3.2@2725,2795 2770,2795 C7.1@2775,2790 2775.32,2790.32 C6.1@2809.69,2790.32
VREF+: C2.2 C4.2 J1.2 R2.2 U1.38 | length 748.4
  Top Layer w15: C4.2@2645,2795.63 C2.2@2680,2795.63 2685,2795.63 2670,2780.63 R2.2@2670,2735 2674.31,2730.69 2674.31,2720.69 v1(2700,2695) ; v1@2880.29,2819.72 2940.01,2819.72 U1.38@2940.3,2819.43
  Signal w15: v1(2700,2695) 2725,2720 2727.5,2720 2777.5,2770 2830,2770 v1(2880,2820)
  Bottom Layer w15: v1@2880.29,2819.72 v1(2880,2820) 3085,2820 3125.51,2860.51 J1.2@3160,2860.51
pads on no net: U3.40 U4.1 U4.2 U4.3 U4.4 U4.5 U4.6 U4.10 U4.11 U4.14 U4.15 U4.20 U4.21 U4.22 U4.23 U4.24 U4.25 U4.26 U4.27 U4.28 U4.33 U4.34 U4.35 U4.38 U4.39 U4.40 U4.45 U4.46 U4.47 U4.48 U6.9 USB. USB.3 USB.9

## Polygon pours and split planes (outlines as drawn)
GND on Top Layer "NONET_L-01_P-001" (solid, pour order 0): 2595,4035 5155,4035 5153.22,4033.22 5153.22,2266.78 2596.78,2266.78 2595,2265
GND on Signal "NONET_L-01_P-001" (solid, pour order 1): 2595,4035 5155,4035 5155,2268.55 5151.45,2265 2595,2265
GND on some "NONET_L-01_P-001" (solid, pour order 2): 2595,4035 5155,4035 5153.22,4033.22 5153.22,2266.78 2596.78,2266.78 2595,2265
GND on Bottom Layer "NONET_L-01_P-001" (solid, pour order 3): 2595,4035 5155,4035 5155,2268.55 5151.45,2265 2595,2265

## Keep-outs
Keep-Out Layer:
  lines w10: 2595,2265 5151.45,2265 ; 2595,2265 2595,4035 ; 2595,2265 2595,4035 ; 2595,2265 5151.45,2265 ; 2595,4035 5155,4035 ; 2595,4035 5155,4035 ; 5151.45,2265 5155,2268.55 ; 5151.45,2265 5155,2268.55 ; 5155,2268.55 5155,4035 ; 5155,2268.55 5155,4035

## Text inside footprints (layer, text, board x,y; h text height)
J3: Top Overlay "1" at 4186.67,3696 h30; Top Overlay "40" at 4934.67,3692 h30